# EAGLE board CT_schematic (EAGLE 7.6.0)

Size 100 x 80 mm. Coordinates in mm from the lower left corner, seen from the top.
Outline: 0,0 100,0 100,80 0,80 0,0
Copper layers (1*16): Top 0.035mm / dielectric 1.5mm / Bottom 0.035mm
Design rules "default": minimum track width 10mil, minimum drill 24mil, track to track 8mil, track to pad 8mil, pad to pad 8mil, via to via 8mil, smd to smd 8mil, copper to edge 40mil, drill to drill 8mil, minimum pad ring 10mil, minimum via ring 8mil, stop-mask expansion 4mil, vias tented up to drill 0mil, thermal gap 10mil

## Footprints (pad centres in the part's own frame; a part is rotated, then mirrored left to right if it is on the bottom)
C0603 = smd 0.8 x 0.8: 1 -0.762,0; 2 0.762,0
C0402 = smd 0.5 x 0.5: 1 -0.508,0; 2 0.508,0
C0805 = smd 1.2 x 1.3: 1 -1.016,0; 2 1.016,0
C1206 = smd 1.3 x 1.6: 1 -1.524,0; 2 1.524,0
L0603 = smd 0.8 x 0.8: 1 -0.762,0; 2 0.762,0
L0805 = smd 1.2 x 1.3: 1 -1.016,0; 2 1.016,0
R0603 = smd 0.8 x 0.8: 1 -0.762,0; 2 0.762,0
VFQFPN36 = smd 1.067 x 0.305: 1 -2.832,2; 2 -2.832,1.5; 3 -2.832,1; 4 -2.832,0.5; 5 -2.832,0; 6 -2.832,-0.5; 7 -2.832,-1; 8 -2.832,-1.5; 9 -2.832,-2; 19 2.832,-2; 20 2.832,-1.5; 21 2.832,-1; 22 2.832,-0.5; 23 2.832,0; 24 2.832,0.5; 25 2.832,1; 26 2.832,1.5; 27 2.832,2 | smd 0.305 x 1.067: 10 -2,-2.832; 11 -1.5,-2.832; 12 -1,-2.832; 13 -0.5,-2.832; 14 0,-2.832; 15 0.5,-2.832; 16 1,-2.832; 17 1.5,-2.832; 18 2,-2.832; 28 2,2.832; 29 1.5,2.832; 30 1,2.832; 31 0.5,2.832; 32 0,2.832; 33 -0.5,2.832; 34 -1,2.832; 35 -1.5,2.832; 36 -2,2.832 | smd 4.242 x 4.242: 37 0,0
LGA14R35P5X6_200X200X100 = smd 0.35 x 0.15: 1 -0.8,0.525; 2 -0.8,0.175; 3 -0.8,-0.175; 4 -0.8,-0.525; 8 0.8,-0.525; 9 0.8,-0.175; 10 0.8,0.175; 11 0.8,0.525 | smd 0.15 x 0.35: 5 -0.35,-0.8; 6 0,-0.8; 7 0.35,-0.8; 12 0.35,0.8; 13 0,0.8; 14 -0.35,0.8
ETRX3587 = smd 1 x 1.4: 1 0,0; 2 1.27,0; 3 2.54,0; 4 3.81,0; 5 5.08,0; 6 6.35,0; 7 7.62,0; 8 8.89,0; 9 10.16,0; 10 11.43,0; 11 12.7,0; 12 13.97,0; 13 15.24,0; 14 16.51,0; 15 17.78,0; 16 19.05,0; 17 20.32,0; 18 21.59,0; 19 22.86,0; 20 22.86,18.8; 21 21.59,18.8; 22 20.32,18.8; 23 19.05,18.8; 24 17.78,18.8; 25 16.51,18.8; 26 15.24,18.8; 27 13.97,18.8; 28 12.7,18.8; 29 11.43,18.8; 30 10.16,18.8; 31 8.89,18.8; 32 7.62,18.8; 33 6.35,18.8
SAMTEC_FTSH-105-01-L-DV-K = smd 0.762 x 2.794: 1 -2.54,-2.032; 2 -2.54,2.032; 3 -1.27,-2.032; 4 -1.27,2.032; 5 0,-2.032; 6 0,2.032; 7 1.27,-2.032; 8 1.27,2.032; 9 2.54,-2.032; 10 2.54,2.032
FCI_10118193-0001LF = smd 0.4 x 1.35: 1 -1.3,2.675; 2 -0.65,2.675; 3 0,2.675; 4 0.65,2.675; 5 1.3,2.675 | smd 1.6 x 1.4: 6 -3.2,2.45; 7 3.2,2.45 | smd 1.9 x 1.9: 8 -1.2,0; 9 1.2,0 | hole 0.5: -3.3,0; 3.3,0
SOT143B = smd 1 x 0.7: 1 -0.75,-1 | smd 0.6 x 0.7: 2 0.95,-1; 3 0.95,1; 4 -0.95,1
ASFL1 = smd 1.7 x 1.5: 1 -1.27,-1.1; 2 1.27,-1.1; 3 1.27,1.1; 4 -1.27,1.1
TSOT-23-5 = smd 1.3 x 0.62: 1 -1.31,0.95; 2 -1.31,0; 3 -1.31,-0.95; 4 1.31,-0.95; 5 1.31,0.95
DFN8_2X3MC = smd 0.813 x 0.305: 1 -1.398,0.75; 2 -1.398,0.25; 3 -1.398,-0.25; 4 -1.398,-0.75; 5 1.398,-0.75; 6 1.398,-0.25; 7 1.398,0.25; 8 1.398,0.75 | smd 1.753 x 1.549: 9 0,0
JST-2-SMD = smd 1 x 4.6: 1 -1,-3.7; 2 1,-3.7 | smd 1.6 x 3.4: NC1 -3.4,1.5; NC2 3.4,1.5
SON-6 = smd 0.55 x 0.3: 1 -0.355,0.5 | smd 0.52 x 0.3: 2 -0.37,0; 3 -0.37,-0.5; 4 0.37,-0.5; 5 0.37,0; 6 0.37,0.5
SW_4-1437565-2 = smd 1.4 x 2.1: 1 -2.23,4.55; 2 -2.23,-4.55; 3 2.23,4.55; 4 2.23,-4.55
LGM67K-G1J2-24-Z = smd 0.8 x 1.4: A -2,0; C 0,0
NC7SZ125M5X = smd 1.3 x 0.7: 1 -1.3,0.95; 2 -1.3,0; 3 -1.3,-0.95; 4 1.3,-0.95; 5 1.3,0.95
DUMMY_PACKAGE_141 = drill 0.3: 1 0,-1; 2 1.5,-1; 3 3,-1

## Placement (x,y rotation side)
C1  1e-07  [C0603]  -53.34,63.5 0 top  (outside the outline)
C2  1e-07  [C0603]  -57.15,63.5 0 top  (outside the outline)
C3  1e-07  [C0603]  -60.96,63.5 0 top  (outside the outline)
C4  4.7e-06  [C0603]  -49.53,63.5 0 top  (outside the outline)
C5  1e-07  [C0603]  -64.77,63.5 0 top  (outside the outline)
C6  1e-07  [C0603]  -68.58,63.5 0 top  (outside the outline)
C7  1e-08  [C0603]  -15.24,68.58 0 top  (outside the outline)
C8  1e-06  [C0603]  -19.05,68.58 0 top  (outside the outline)
C9  1e-07  [C0402]  -60.96,68.58 0 top  (outside the outline)
C10  1e-07  [C0402]  -64.77,68.58 0 top  (outside the outline)
C11  1e-07  [C0402]  -68.58,68.58 0 top  (outside the outline)
C12  1e-07  [C0402]  -15.24,73.66 0 top  (outside the outline)
C13  1e-08  [C0402]  -19.05,73.66 0 top  (outside the outline)
C14  1e-05  [C0805]  -68.58,52.07 0 top  (outside the outline)
C15  1e-05  [C0805]  -15.24,58.42 0 top  (outside the outline)
C16  1e-07  [C0402]  -22.86,73.66 0 top  (outside the outline)
C17  1e-05  [C1206]  -38.1,52.07 0 top  (outside the outline)
C18  1e-05  [C1206]  -44.45,52.07 0 top  (outside the outline)
C19  1e-08  [C0402]  -26.67,73.66 0 top  (outside the outline)
C20  1e-08  [C0402]  -30.48,73.66 0 top  (outside the outline)
C21  1e-08  [C0402]  -34.29,73.66 0 top  (outside the outline)
F1  240.0  [L0603]  -22.86,68.58 0 top  (outside the outline)
I1  2.2e-06  [L0805]  -20.32,58.42 0 top  (outside the outline)
R1  10000.0  [R0603]  -53.34,58.42 0 top  (outside the outline)
R2  1000.0  [R0603]  -26.67,68.58 0 top  (outside the outline)
R3  1600.5  [R0603]  -30.48,68.58 0 top  (outside the outline)
R4  4700.0  [R0603]  -34.29,68.58 0 top  (outside the outline)
R5  4700.0  [R0603]  -38.1,68.58 0 top  (outside the outline)
R6  2200.0  [R0603]  -41.91,68.58 0 top  (outside the outline)
R7  2200.0  [R0603]  -45.72,68.58 0 top  (outside the outline)
R8  10000.0  [R0603]  -58.42,58.42 0 top  (outside the outline)
R9  10000.0  [R0603]  -63.5,58.42 0 top  (outside the outline)
R10  10000.0  [R0603]  -68.58,58.42 0 top  (outside the outline)
R11  10000.0  [R0603]  -15.24,63.5 0 top  (outside the outline)
R12  10000.0  [R0603]  -20.32,63.5 0 top  (outside the outline)
R13  10000.0  [R0603]  -25.4,63.5 0 top  (outside the outline)
R14  10000.0  [R0603]  -30.48,63.5 0 top  (outside the outline)
R15  5.0  [R0603]  -49.53,68.58 0 top  (outside the outline)
R16  220000.0  [R0603]  -38.1,58.42 0 top  (outside the outline)
R17  1000000.0  [R0603]  -33.02,58.42 0 top  (outside the outline)
R18  10000.0  [R0603]  -35.56,63.5 0 top  (outside the outline)
R19  10000.0  [R0603]  -40.64,63.5 0 top  (outside the outline)
R20  9100.0  [R0603]  -53.34,68.58 0 top  (outside the outline)
R21  680000.0  [R0603]  -43.18,58.42 0 top  (outside the outline)
R22  120000.0  [R0603]  -48.26,58.42 0 top  (outside the outline)
R23  2000.0  [R0603]  -57.15,68.58 0 top  (outside the outline)
R24  10000.0  [R0603]  -45.72,63.5 0 top  (outside the outline)
U1  stm32f103t4u6  [VFQFPN36]  -60.96,41.91 0 top  (outside the outline)
U2  BMC150  [LGA14R35P5X6_200X200X100]  -33.02,52.07 0 top  (outside the outline)
U3  ETRX3587  [ETRX3587]  -48.26,1.27 0 top  (outside the outline)
U4  FTSH-105-01-L-DV-K  [SAMTEC_FTSH-105-01-L-DV-K]  -35.56,30.48 0 top  (outside the outline)
U5  10118193-0001LF  [FCI_10118193-0001LF]  -50.8,40.64 0 top  (outside the outline)
U6  prtr5v0u2ax  [SOT143B]  -46.99,73.66 0 top  (outside the outline)
U7  ASFL1-25MHZ-NCS  [ASFL1]  -41.91,41.91 0 top  (outside the outline)
U8  ltc3406es5  [TSOT-23-5]  -25.4,57.15 0 top  (outside the outline)
U9  MCP73831T-2ACI/MC  [DFN8_2X3MC]  -62.23,72.39 0 top  (outside the outline)
U10  S2B-PH-SM4-TB(LF)(SN)  [JST-2-SMD]  -22.86,44.45 0 top  (outside the outline)
U11  TPS3895ADRYR  [SON-6]  -55.88,72.39 0 top  (outside the outline)
U12  4-1437565-2  [SW_4-1437565-2]  -57.15,29.21 0 top  (outside the outline)
U13  Q65110A2395  [LGM67K-G1J2-24-Z]  -17.78,52.07 0 top  (outside the outline)
U14  nc7sz125m5x  [NC7SZ125M5X]  -49.53,50.8 0 top  (outside the outline)
U15  nc7sz125m5x  [NC7SZ125M5X]  -55.88,50.8 0 top  (outside the outline)
U16  nc7sz125m5x  [NC7SZ125M5X]  -62.23,50.8 0 top  (outside the outline)
U17  Dummy  [DUMMY_PACKAGE_141]  -53.34,73.66 0 top  (outside the outline)

## Library data of the parts
C1-C21 F1 I1 R1-R24 U1-U17 = circuit_tree

## Nets
CLK_U1_2: U1.2 U7.3
GND: C1.2 C2.2 C3.2 C4.2 C5.2 C6.2 C7.2 C8.2 C9.2 C10.2 C11.2 C12.2 C13.2 C14.2 C15.1 C15.2 C16.2 C17.2 C18.2 C19.2 C20.2 C21.2 R2.2 R8.2 R10.2 R14.2 R15.2 R16.2 R20.2 R22.2 R23.2 U1.5 U1.18 U1.26 U1.36 U1.37 U2.1 U2.6 U2.7 U2.9 U3.1 U3.13 U3.19 U3.20 U3.31 U3.33 U4.3 U4.5 U5.5 U5.6 U5.7 U5.8 U5.9 U6.1 U7.2 U8.2 U9.6 U9.9 U10.2 U11.2 U13.C U14.2 U14.3 U15.1 U15.3 U16.1 U16.3 U17.1
INPUT_USBPOWER_5V: C17.1 R24.2 U5.1 U6.4 U9.1 U9.2
NET_U1_4: R5.1 U1.4 U16.4
NET_U1_6: C7.1 C8.1 F1.1 U1.6
NET_U1_31: R3.1 U1.31 U13.A
NET_U1_32: R1.1 U1.32 U12.3 U12.4
NET_U1_33: R6.1 U1.33 U2.11
NET_U1_34: R7.1 U1.34 U2.14
NET_U1_35: R8.1 U1.35
NET_U3_7: R4.1 U3.7 U15.4
NET_U3_21: R10.1 U3.21
NET_U4_2: R13.1 U4.2
NET_U4_4: R14.1 U4.4
NET_U4_9: R15.1 U4.9
NET_U8_1: U8.1
NET_U8_3: I1.1 U8.3
NET_U8_5: R16.1 R17.1 U8.5
NET_U8_ATNET_3: I1.2 R17.2
NET_U9_5: R24.1 U9.5
NET_U9_8: R23.1 U9.8
NET_U11_1: R19.1 R20.1 U11.1
NET_U11_3: R21.2 R22.1 U11.3
NET_U11_4: R18.1 U11.4 U14.4 U15.2 U16.2
NET_U12_1: R2.1 U12.1 U12.2
PROC_ADC1_IN4: U1.11 U17.2
PROC_ADC1_IN7: U1.14 U17.3
PROC_SYS_JTDI: R12.1 U1.29 U4.8
PROC_SYS_JTDO_TRACESWO: U1.30 U4.6
PROC_USART2_CTS: U1.7 U3.8
PROC_USART2_RTS: U1.8 U3.6
PROC_USART2_RX: U1.10 U3.17
PROC_USART2_TX: U1.9 U3.18
PROC_USB_DM: U1.23 U5.2 U6.3
PROC_USB_DP: U1.24 U5.3 U6.2
RST_OUT_U4_JTAG_RST_B: R11.1 U4.10 U14.1
VCC_S1_3V7: C14.1 C18.1 U8.4 U9.3 U9.4 U10.1
VCC_TIER1_3V3: C1.1 C2.1 C3.1 C4.1 C5.1 C6.1 C9.1 C10.1 C11.1 C12.1 C13.1 C15.2 C16.1 C19.1 C20.1 C21.1 F1.2 I1.2 R1.2 R3.2 R4.2 R5.2 R6.2 R7.2 R9.1 R9.2 R11.2 R12.2 R13.2 R17.2 R18.2 R19.2 R21.1 U1.1 U1.19 U1.27 U2.8 U2.10 U2.12 U2.13 U3.32 U4.1 U7.4 U11.6 U14.5 U15.5 U16.5

## Tracks (layer width: path | path; a pad name or v marks a point on that pad's centre or on a via)
CLK_U1_2  (1 unrouted)
GND  (67 unrouted)
INPUT_USBPOWER_5V  (5 unrouted)
NET_U1_4  (2 unrouted)
NET_U1_6  (3 unrouted)
NET_U1_31  (2 unrouted)
NET_U1_32  (3 unrouted)
NET_U1_33  (2 unrouted)
NET_U1_34  (2 unrouted)
NET_U1_35  (1 unrouted)
NET_U3_7  (2 unrouted)
NET_U3_21  (1 unrouted)
NET_U4_2  (1 unrouted)
NET_U4_4  (1 unrouted)
NET_U4_9  (1 unrouted)
NET_U8_3  (1 unrouted)
NET_U8_5  (2 unrouted)
NET_U8_ATNET_3  (1 unrouted)
NET_U9_5  (1 unrouted)
NET_U9_8  (1 unrouted)
NET_U11_1  (2 unrouted)
NET_U11_3  (2 unrouted)
NET_U11_4  (4 unrouted)
NET_U12_1  (2 unrouted)
PROC_ADC1_IN4  (1 unrouted)
PROC_ADC1_IN7  (1 unrouted)
PROC_SYS_JTDI  (2 unrouted)
PROC_SYS_JTDO_TRACESWO  (1 unrouted)
PROC_USART2_CTS  (1 unrouted)
PROC_USART2_RTS  (1 unrouted)
PROC_USART2_RX  (1 unrouted)
PROC_USART2_TX  (1 unrouted)
PROC_USB_DM  (2 unrouted)
PROC_USB_DP  (2 unrouted)
RST_OUT_U4_JTAG_RST_B  (2 unrouted)
VCC_S1_3V7  (5 unrouted)
VCC_TIER1_3V3  (46 unrouted)